# Altium PCB XCKU5P.PcbDoc (part 4 of 4)
Units mil, origin at the board's own origin, x right, y up, seen from the top; angles counter-clockwise.
Board outline 2716.54 x 2559.06 mil, 5 copper layers (Top Layer, SIG1, SIG2, SIG3, Bottom Layer); 206 components, 306 nets, 1544 pads, 186 vias.
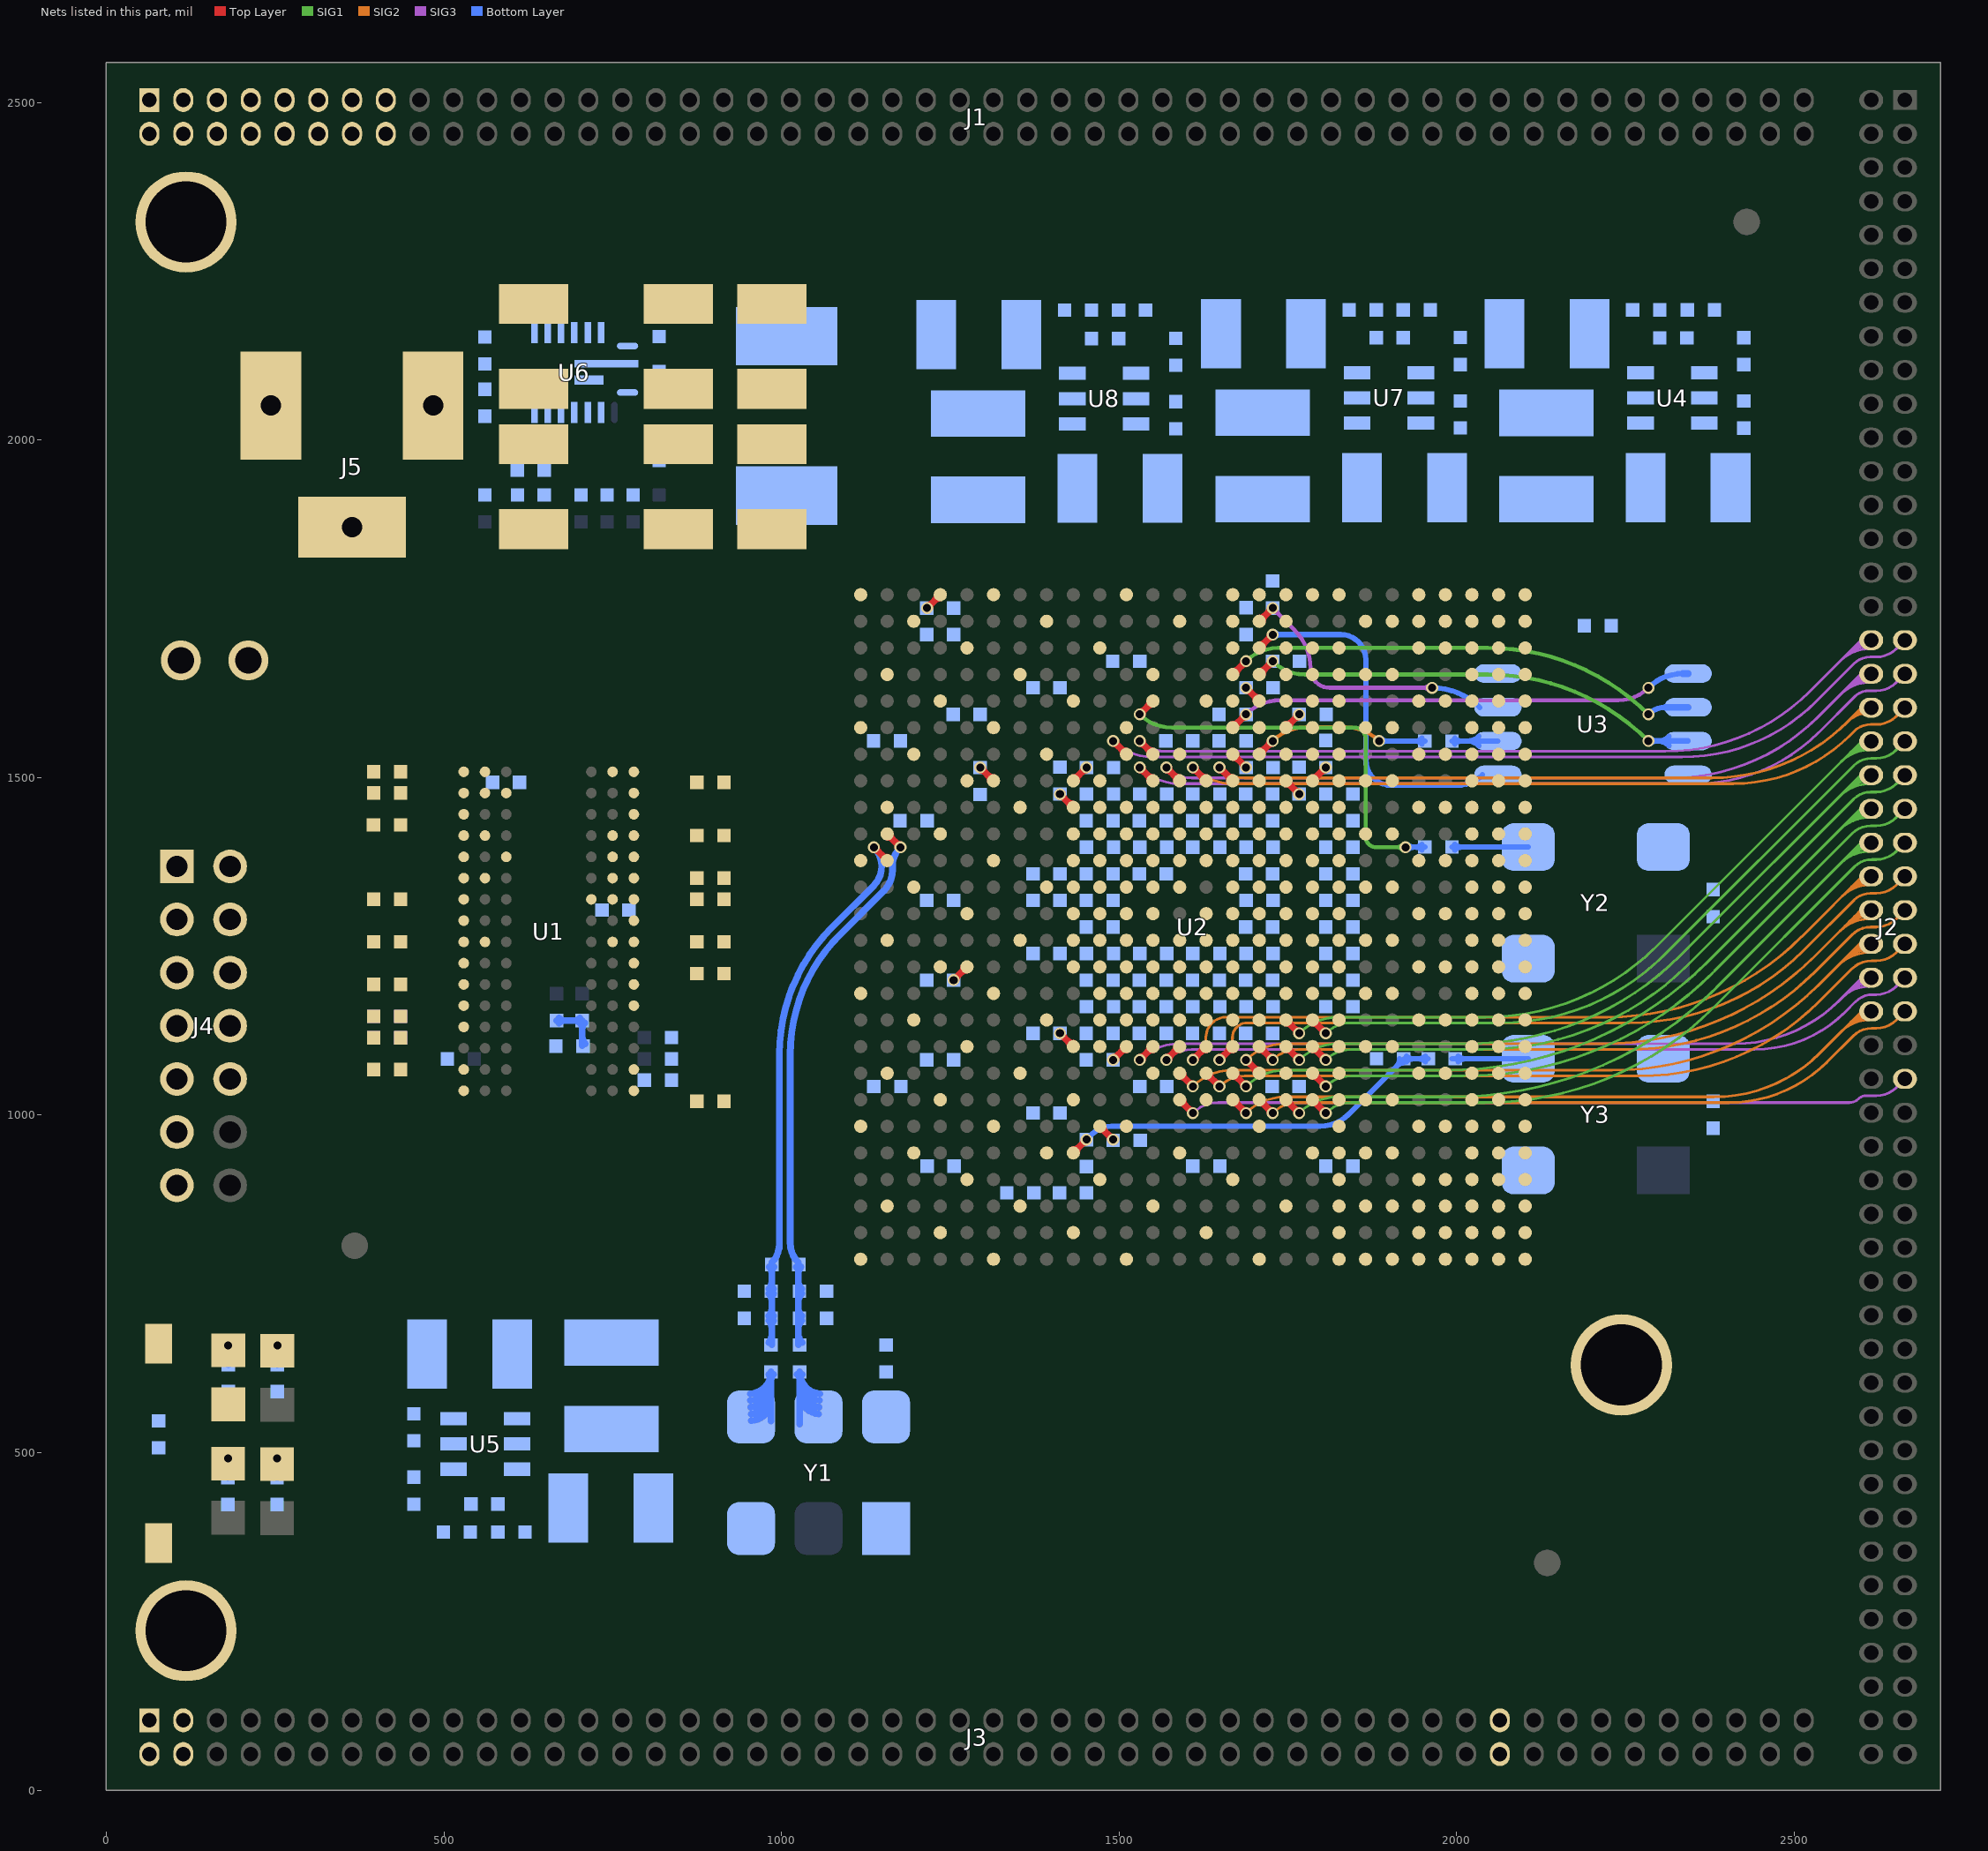
[diagram p7: the nets of this part, all layers, seen from the top]

## Via types
v1: diameter 17.72, hole 11.81, Top Layer to Bottom Layer, tented both sides, 186 vias

## Nets (pads, with @x,y where several pads share a name; then routed paths per layer and width w, separated by ;. In a path a pad name is that pad's centre, name@x,y a point inside that pad or via, vN(x,y) a via of type N, cw(c..) or ccw(c..) an arc to the next point about the centre after c; other vN are vias at no path point) (continued)
G9: J2.45 U2.G9 | length 1058.3
  Top Layer w10: U2.G9@1786.52,1017.89 cw(c1786.52,1006.19) 1794.79,1014.46 cw(c1803.05,1022.73) U2.G9@1791.36,1022.73 ; U2.G9@1786.52,1022.73 v1(1806.21,1003.04) ; v1@1802.35,1003.04 ccw(c1793.03,1003.04) 1799.62,1009.63 ccw(c1806.21,1016.21) v1@1806.21,1006.9
  SIG1 w4: v1(1806.21,1003.04) cw(c1843.47,965.78) 1843.47,1018.48 2041.62,1018.48 ccw(c2041.62,1496.87) 2379.9,1158.6 2589.16,1367.86 cw(c2614.84,1342.19) 2614.84,1378.5 2621.4,1378.5 ccw(c2621.4,1421.04) 2651.48,1390.96 J2.45@2664.02,1403.5
G10: J2.46 U2.G10 | length 1183
  Top Layer w10: U2.G10@1747.15,1017.89 cw(c1747.15,1006.19) 1755.42,1014.46 cw(c1763.68,1022.73) U2.G10@1751.99,1022.73 ; U2.G10@1747.15,1022.73 v1(1766.84,1003.04) ; v1@1762.98,1003.04 ccw(c1753.66,1003.04) 1760.25,1009.63 ccw(c1766.84,1016.21) v1@1766.84,1006.9
  SIG1 w4: v1(1766.84,1003.04) cw(c1824.62,945.26) 1824.62,1026.98 1994.11,1026.98 ccw(c1994.11,1579.51) 2384.37,1188.37 ; 2384.81,1188.81 J2.46@2608.35,1412.35 ; 2569.53,1373.53 cw(c2611.07,1332) J2.46@2611.07,1390.74 ; 2576.36,1380.36 cw(c2611.07,1345.65) J2.46@2611.07,1394.74 ; 2583.19,1387.19 cw(c2611.07,1359.31) J2.46@2611.07,1398.74 ; 2590.02,1394.02 cw(c2611.07,1372.97) J2.46@2611.07,1402.74
G11: J2.55 U2.G11 | length 1045.1
  Top Layer w10: U2.G11@1707.78,1017.89 cw(c1707.78,1006.19) 1716.05,1014.46 cw(c1724.31,1022.73) U2.G11@1712.62,1022.73 ; U2.G11@1707.78,1022.73 v1(1727.47,1003.04) ; v1@1723.61,1003.04 ccw(c1714.29,1003.04) 1720.88,1009.63 ccw(c1727.47,1016.21) v1@1727.47,1006.9
  SIG2 w4: v1(1727.47,1003.04) cw(c1764.73,965.78) 1764.73,1018.48 2403.15,1018.48 ccw(c2403.15,1224.47) 2548.81,1078.81 2587.31,1117.31 cw(c2614.33,1090.28) 2614.33,1128.5 2621.4,1128.5 ccw(c2621.4,1171.04) 2651.48,1140.96 J2.55@2664.02,1153.5
G12: J2.56 U2.G12 | length 1170.1
  Top Layer w10: U2.G12@1668.41,1017.89 cw(c1668.41,1006.19) 1676.68,1014.46 cw(c1684.94,1022.73) U2.G12@1673.25,1022.73 ; U2.G12@1668.41,1022.73 v1(1688.1,1003.04) ; v1@1684.24,1003.04 ccw(c1674.92,1003.04) 1681.51,1009.63 ccw(c1688.1,1016.21) v1@1688.1,1006.9
  SIG2 w4: v1(1688.1,1003.04) cw(c1745.88,945.26) 1745.88,1026.98 2381.89,1026.98 ccw(c2381.89,1247.13) 2537.56,1091.46 J2.56@2606.75,1160.65 ; 2569.7,1123.6 cw(c2611.07,1082.24) J2.56@2611.07,1140.74 ; 2576.53,1130.43 cw(c2611.07,1095.89) J2.56@2611.07,1144.74 ; 2583.36,1137.26 cw(c2611.07,1109.55) J2.56@2611.07,1148.74 ; 2590.19,1144.09 cw(c2611.07,1123.21) J2.56@2611.07,1152.74
G14: J2.59 U2.G14 | length 1130.8
  Top Layer w10: U2.G14@1589.67,1017.89 cw(c1589.67,1006.19) 1597.94,1014.46 cw(c1606.2,1022.73) U2.G14@1594.51,1022.73 ; U2.G14@1589.67,1022.73 v1(1609.36,1003.04) ; v1@1605.5,1003.04 ccw(c1596.18,1003.04) 1602.77,1009.63 ccw(c1609.36,1016.21) v1@1609.36,1006.9
  SIG3 w4: v1(1609.36,1003.04) cw(c1646.62,965.78) 1646.62,1018.48 2573,1018.48 2581.77,1018.48 ccw(c2581.77,1037.09) 2594.93,1023.93 cw(c2605.96,1012.89) 2605.96,1028.5 2621.4,1028.5 ccw(c2621.4,1071.04) 2651.48,1040.96 J2.59@2664.02,1053.5
GCLK1: R35.2 U2.AB15 | length 723.4
  Top Layer w10: v1(1530.62,1593.59) U2.AB15@1550.3,1613.28 ; v1@1530.62,1597.45 ccw(c1530.62,1606.76) 1537.2,1600.18 ccw(c1543.79,1593.59) v1@1534.47,1593.59 ; U2.AB15@1545.46,1613.28 cw(c1533.77,1613.28) 1542.03,1605.01 cw(c1550.3,1596.75) U2.AB15@1550.3,1608.44
  SIG1 w6: v1@1535.72,1588.48 v1(1530.62,1593.59) ccw(c1578.26,1641.23) 1578.26,1573.86 1619.5,1573.86 1848.63,1573.86 cw(c1848.63,1557.19) 1865.31,1557.19 1865.31,1411.99 ccw(c1880.56,1411.99) 1880.56,1396.74 v1(1924.31,1396.74) ; v1@1920.17,1392.6 ccw(c1910.17,1382.6) 1910.17,1396.74 ccw(c1910.17,1410.89) v1@1920.17,1400.89
  Bottom Layer w8: v1@1923.43,1397 R35.2@1953,1397 ; v1@1927.75,1393.31 cw(c1936.66,1384.4) 1936.66,1397 ; v1@1927.75,1400.18 ccw(c1935.43,1407.86) 1935.43,1397 ; R35.2@1948.76,1392.76 ccw(c1938.51,1382.51) 1938.51,1397 ccw(c1938.51,1411.49) R35.2@1948.76,1401.24
GCLK2: C121.1 R56.2 R57.1 U2.E18 | length 678.4
  Top Layer w10: U2.E18@1432.19,943.99 v1(1451.88,963.67) ; U2.E18@1432.19,948.83 ccw(c1432.19,960.52) 1440.46,952.25 ccw(c1448.72,943.99) U2.E18@1437.03,943.99 ; v1@1448.02,963.67 cw(c1438.7,963.67) 1445.29,957.09 cw(c1451.88,950.5) v1@1451.88,959.82
  Bottom Layer w8: v1(1451.88,963.67) 1459.82,971.62 cw(c1488.5,942.94) 1488.5,983.5 1797.8,983.5 ccw(c1797.8,1043.02) 1839.89,1000.93 1849.48,1010.52 R57.1@1922.31,1083.36 ; 1910.36,1071.41 ccw(c1898.41,1083.36) R57.1@1915.31,1083.36 ; R57.1@1912.78,1073.83 cw(c1921.31,1065.29) R57.1@1921.31,1077.36 ; R57.1@1924.36,1083.36 C121.1@1958,1083.36 ; R57.1@1925.56,1079.12 cw(c1935.8,1068.88) 1935.8,1083.36 cw(c1935.8,1097.85) R57.1@1925.56,1087.61 ; C121.1@1953.76,1079.12 ccw(c1943.51,1068.88) 1943.51,1083.36 ccw(c1943.51,1097.85) C121.1@1953.76,1087.61
GND: C1.2 C2.2 C3.2 C4.2 C5.2 C6.2 C7.2 C8.2 C9.2 C10.2 C11.2 C12.2 C13.2 C15.2 C16.2 C17.2 C18.1 C19.1 C20.2 C21.2 C22.2 C23.2 C24.1 C26.2 C27.2 C28.2 C29.2 C30.2 C31.2 C32.2 C33.2 C34.2 C35.2 C36.2 C37.2 C38.2 C39.2 C40.2 C41.2 C42.2 C43.2 C44.2 C45.2 C46.2 C47.2 C48.2 C49.2 C50.2 C51.2 C52.2 C53.2 C54.2 C55.2 C56.2 C57.2 C58.2 C59.2 C60.2 C61.2 C62.2 C63.2 C64.2 C65.2 C66.2 C67.2 C68.2 C69.2 C70.2 C71.2 C72.2 C73.2 C74.2 C75.2 C76.2 C77.2 C78.2 C79.2 C82.2 C83.2 C84.2 C85.2 C86.2 C87.2 C88.2 C89.2 C90.2 C94.2 C95.2 C97.2 C99.2 C100.2 C101.2 C102.2 C103.2 C104.2 C105.2 C106.2 C107.2 C108.2 C109.2 C110.2 C111.2 C112.2 C113.2 C114.2 C115.2 C116.2 C117.2 C120.2 J1.1 J1.2 J1.3 J1.4 J1.5 J1.6 J1.13 J1.14 J3.1 J3.2 J3.3 J3.4 J3.81 J3.82 J4.1 J4.2 J4.3 J4.4 J4.5 J4.6 J4.7 J5.2 J6.1 K1.2 pad.0 R3.1 R4.2 R5.2 R8.2 R11.2 R14.2 R17.2 R20.1 R25.2 R27.1 R30.2 R44.2 R45.2 R46.2 R47.2 R48.2 R49.2 R50.2 R51.2 R54.2 R55.2 R57.2 U1.A2 U1.A8 U1.B2 U1.C9 U1.D2 U1.D8 U1.E1 U1.E3 U1.E8 U1.E9 U1.F1 U1.G8 U1.H1 U1.H9 U1.K1 U1.K9 U1.M9 U1.N1 U1.T1 U2.A1 U2.A2 U2.A3 U2.A4 U2.A5 U2.A6 U2.A7 U2.A8 U2.A11 U2.A16 U2.A21 U2.A26 U2.AA1 U2.AA2 U2.AA3 U2.AA6 U2.AA7 U2.AA8 U2.AA9 U2.AA16 U2.AA26 U2.AB1 U2.AB2 U2.AB3 U2.AB4 U2.AB5 U2.AB8 U2.AB13 U2.AB23 U2.AC1 U2.AC2 U2.AC3 U2.AC6 U2.AC7 U2.AC8 U2.AC9 U2.AC10 U2.AC20 U2.AC25 U2.AD1 U2.AD2 U2.AD3 U2.AD4 U2.AD5 U2.AD8 U2.AD9 U2.AD10 U2.AD17 U2.AE1 U2.AE2 U2.AE3 U2.AE4 U2.AE5 U2.AE6 U2.AE7 U2.AE10 U2.AE14 U2.AE19 U2.AE24 U2.AF1 U2.AF2 U2.AF3 U2.AF4 U2.AF5 U2.AF8 U2.AF9 U2.AF10 U2.AF11 U2.AF12 U2.AF16 U2.AF21 U2.AF26 U2.B1 U2.B2 U2.B3 U2.B4 U2.B5 U2.B8 U2.B13 U2.B18 U2.B23 U2.C1 U2.C2 U2.C3 U2.C4 U2.C5 U2.C6 U2.C7 U2.C8 U2.C10 U2.C15 U2.C25 U2.D1 U2.D2 U2.D3 U2.D4 U2.D5 U2.D8 U2.D12 U2.D22 U2.E1 U2.E2 U2.E3 U2.E6 U2.E7 U2.E8 U2.E19 U2.F1 U2.F2 U2.F3 U2.F4 U2.F5 U2.F8 U2.F11 U2.F16 U2.F21 U2.F26 U2.G1 U2.G2 U2.G3 U2.G6 U2.G7 U2.G8 U2.G13 U2.G23 U2.H1 U2.H2 U2.H3 U2.H4 U2.H5 U2.H8 U2.H20 U2.J1 U2.J2 U2.J3 U2.J6 U2.J7 U2.J8 U2.J17 U2.K1 U2.K2 U2.K3 U2.K4 U2.K5 U2.K8 U2.K12 U2.K14 U2.K16 U2.K19 U2.K24 U2.L1 U2.L2 U2.L3 U2.L6 U2.L7 U2.L8 U2.L11 U2.L13 U2.L15 U2.L17 U2.L21 U2.L26 U2.M1 U2.M2 U2.M3 U2.M4 U2.M5 U2.M8 U2.M10 U2.M12 U2.M14 U2.M16 U2.M23 U2.N1 U2.N2 U2.N3 U2.N6 U2.N7 U2.N8 U2.N11 U2.N13 U2.N15 U2.N17 U2.N20 U2.N25 U2.P1 U2.P2 U2.P3 U2.P4 U2.P5 U2.P8 U2.P10 U2.P12 U2.P13 U2.P16 U2.R1 U2.R2 U2.R3 U2.R6 U2.R7 U2.R8 U2.R11 U2.R14 U2.R15 U2.R17 U2.R19 U2.R24 U2.T1 U2.T2 U2.T3 U2.T4 U2.T5 U2.T8 U2.T10 U2.T12 U2.T13 U2.T14 U2.T16 U2.T21 U2.T26 U2.U1 U2.U2 U2.U3 U2.U6 U2.U7 U2.U8 U2.U11 U2.U13 U2.U15 U2.U17 U2.U18 U2.V1 U2.V2 U2.V3 U2.V4 U2.V5 U2.V8 U2.V10 U2.V12 U2.V14 U2.V16 U2.V20 U2.V25 U2.W1 U2.W2 U2.W3 U2.W6 U2.W7 U2.W8 U2.W11 U2.W17 U2.W22 U2.Y1 U2.Y2 U2.Y3 U2.Y4 U2.Y5 U2.Y8 U2.Y9 U2.Y19 U3.4 U4.1 U5.1 U6.5 U6.10 U6.11 U6.12 U6.13 U6.14 U6.15 U7.1 U8.1 V4.2 Y1.3 Y2.2 Y3.2
H9: J2.43 U2.H9 | length 1057.3
  Top Layer w10: U2.H9@1786.52,1057.26 cw(c1786.52,1045.57) 1794.79,1053.83 cw(c1803.05,1062.1) U2.H9@1791.36,1062.1 ; U2.H9@1786.52,1062.1 v1(1806.21,1042.41) ; v1@1802.35,1042.41 ccw(c1793.03,1042.41) 1799.62,1049 ccw(c1806.21,1055.59) v1@1806.21,1046.27
  SIG1 w4: v1(1806.21,1042.41) cw(c1843.47,1005.15) 1843.47,1057.85 2010,1057.85 ccw(c2010,1580.4) 2379.3,1210.7 ; 2381.69,1213.09 2585.75,1417.15 cw(c2613.15,1389.75) 2613.15,1428.5 2621.4,1428.5 ccw(c2621.4,1471.04) 2651.48,1440.96 J2.43@2664.02,1453.5
H11: J2.50 U2.H11 | length 1217.1
  Top Layer w10: v1@1688.09,1077.93 cw(c1688.09,1068.61) 1694.68,1075.2 cw(c1701.27,1081.78) v1@1691.95,1081.78 ; v1(1688.09,1081.78) U2.H11@1707.78,1062.1 ; U2.H11@1702.94,1062.1 ccw(c1691.25,1062.1) 1699.51,1070.37 ccw(c1707.78,1078.63) U2.H11@1707.78,1066.94
  SIG2 w4: v1(1688.09,1081.78) cw(c1745.88,1024) 1745.88,1105.72 2216.82,1105.72 ccw(c2216.82,1549.68) 2530.75,1235.75 J2.50@2607.25,1312.25 ; 2567.82,1272.82 cw(c2611.07,1229.58) J2.50@2611.07,1290.74 ; 2574.65,1279.65 cw(c2611.07,1243.24) J2.50@2611.07,1294.74 ; 2581.48,1286.48 cw(c2611.07,1256.9) J2.50@2611.07,1298.74 ; 2588.31,1293.31 cw(c2611.07,1270.55) J2.50@2611.07,1302.74 ; 2595.14,1300.14 cw(c2611.07,1284.21) J2.50@2611.07,1306.74
H12: J2.44 U2.H12 | length 1296.2
  Top Layer w10: U2.H12@1668.41,1057.26 cw(c1668.41,1045.57) 1676.68,1053.83 cw(c1684.94,1062.1) U2.H12@1673.25,1062.1 ; U2.H12@1668.41,1062.1 v1(1688.1,1042.41) ; v1@1684.24,1042.41 ccw(c1674.92,1042.41) 1681.51,1049 ccw(c1688.1,1055.59) v1@1688.1,1046.27
  SIG1 w4: v1(1688.1,1042.41) cw(c1745.88,984.63) 1745.88,1066.35 1983.78,1066.35 ccw(c1983.78,1615.01) 2371.75,1227.05 J2.44@2608.8,1464.1 ; 2567.31,1422.61 cw(c2611.07,1378.86) J2.44@2611.07,1440.74 ; 2574.14,1429.44 cw(c2611.07,1392.51) J2.44@2611.07,1444.74 ; 2580.97,1436.27 cw(c2611.07,1406.17) J2.44@2611.07,1448.74 ; 2587.8,1443.1 cw(c2611.07,1419.83) J2.44@2611.07,1452.74 ; 2594.63,1449.93 cw(c2611.07,1433.49) J2.44@2611.07,1456.74
H13: J2.51 U2.H13 | length 1141.5
  Top Layer w10: U2.H13@1629.04,1057.26 cw(c1629.04,1045.57) 1637.31,1053.83 cw(c1645.57,1062.1) U2.H13@1633.88,1062.1 ; U2.H13@1629.04,1062.1 v1(1648.73,1042.41) ; v1@1644.87,1042.41 ccw(c1635.55,1042.41) 1642.14,1049 ccw(c1648.73,1055.59) v1@1648.73,1046.27
  SIG2 w4: v1(1648.73,1042.41) cw(c1685.99,1005.15) 1685.99,1057.85 2270.88,1057.85 ccw(c2270.88,1433.66) 2536.62,1167.92 2585.17,1216.47 cw(c2614.21,1187.44) 2614.21,1228.5 2621.4,1228.5 ccw(c2621.4,1271.04) 2651.48,1240.96 J2.51@2664.02,1253.5
H14: J2.52 U2.H14 | length 1307.4
  Top Layer w10: U2.H14@1589.67,1057.26 cw(c1589.67,1045.57) 1597.94,1053.83 cw(c1606.2,1062.1) U2.H14@1594.51,1062.1 ; U2.H14@1589.67,1062.1 v1(1609.36,1042.41) ; v1@1605.5,1042.41 ccw(c1596.18,1042.41) 1602.77,1049 ccw(c1609.36,1055.59) v1@1609.36,1046.27
  SIG2 w4: v1(1609.36,1042.41) cw(c1667.14,984.63) 1667.14,1066.35 2230.34,1066.35 ccw(c2230.34,1499) 2536.27,1193.07 ; 2536.27,1193.07 J2.52@2605.55,1262.35 ; 2564.75,1221.55 cw(c2611.07,1175.24) J2.52@2611.07,1240.74 ; 2571.58,1228.38 cw(c2611.07,1188.89) J2.52@2611.07,1244.74 ; 2578.41,1235.21 cw(c2611.07,1202.55) J2.52@2611.07,1248.74 ; 2585.24,1242.04 cw(c2611.07,1216.21) J2.52@2611.07,1252.74 ; 2592.07,1248.87 cw(c2611.07,1229.86) J2.52@2611.07,1256.74
J9: J2.41 U2.J9 | length 1069.2
  Top Layer w10: U2.J9@1786.52,1096.63 cw(c1786.52,1084.94) 1794.79,1093.2 cw(c1803.05,1101.47) U2.J9@1791.36,1101.47 ; U2.J9@1786.52,1101.47 v1(1806.21,1081.78) ; v1@1802.35,1081.78 ccw(c1793.03,1081.78) 1799.62,1088.37 ccw(c1806.21,1094.96) v1@1806.21,1085.64
  SIG1 w4: v1(1806.21,1081.78) cw(c1843.47,1044.52) 1843.47,1097.22 2038.68,1097.22 ccw(c2038.68,1528) 2343.29,1223.39 2587.89,1467.99 cw(c2613.26,1442.62) 2613.26,1478.5 2621.4,1478.5 ccw(c2621.4,1521.04) 2651.48,1490.96 J2.41@2664.02,1503.5
J10: J2.42 U2.J10 | length 1220.7
  Top Layer w10: U2.J10@1747.15,1096.63 cw(c1747.15,1084.94) 1755.42,1093.2 cw(c1763.68,1101.47) U2.J10@1751.99,1101.47 ; U2.J10@1747.15,1101.47 v1(1766.84,1081.78) ; v1@1762.98,1081.78 ccw(c1753.66,1081.78) 1760.25,1088.37 ccw(c1766.84,1094.96) v1@1766.84,1085.64
  SIG1 w4: v1(1766.84,1081.78) cw(c1824.62,1024) 1824.62,1105.72 2015.56,1105.72 ccw(c2015.56,1552.72) 2331.64,1236.64 J2.42@2606.95,1511.95 ; 2567.82,1472.82 cw(c2611.07,1429.58) J2.42@2611.07,1490.74 ; 2574.65,1479.65 cw(c2611.07,1443.24) J2.42@2611.07,1494.74 ; 2581.48,1486.48 cw(c2611.07,1456.9) J2.42@2611.07,1498.74 ; 2588.31,1493.31 cw(c2611.07,1470.55) J2.42@2611.07,1502.74 ; 2595.14,1500.14 cw(c2611.07,1484.21) J2.42@2611.07,1506.74
J11: J2.49 U2.J11 | length 1066.6
  Top Layer w10: U2.J11@1707.78,1096.63 cw(c1707.78,1084.94) 1716.05,1093.2 cw(c1724.31,1101.47) U2.J11@1712.62,1101.47 ; U2.J11@1707.78,1101.47 v1(1727.47,1081.78) ; v1@1723.61,1081.78 ccw(c1714.29,1081.78) 1720.88,1088.37 ccw(c1727.47,1094.96) v1@1727.47,1085.64
  SIG2 w4: v1(1727.47,1081.78) cw(c1764.73,1044.52) 1764.73,1097.22 2253.22,1097.22 ccw(c2253.22,1489.29) 2530.45,1212.05 2585.29,1266.89 cw(c2613.32,1238.86) 2613.32,1278.5 2621.4,1278.5 ccw(c2621.4,1321.04) 2651.48,1290.96 J2.49@2664.02,1303.5
J12: J2.47 U2.J12 | length 1179.7
  Top Layer w10: v1(1648.72,1081.78) U2.J12@1668.41,1101.47 ; v1@1648.72,1085.64 ccw(c1648.72,1094.96) 1655.31,1088.37 ccw(c1661.9,1081.78) v1@1652.58,1081.78 ; U2.J12@1663.57,1101.47 cw(c1651.88,1101.47) 1660.14,1093.2 cw(c1668.41,1084.94) U2.J12@1668.41,1096.63
  SIG2 w4: v1(1648.72,1081.78) 1658.28,1091.34 ccw(c1634.81,1114.81) 1668,1114.81 cw(c1689.79,1114.81) 1689.79,1136.59 2254.91,1136.59 ccw(c2254.91,1502.79) 2513.85,1243.85 2588.47,1318.47 cw(c2612.68,1294.27) 2612.68,1328.5 2621.4,1328.5 ccw(c2621.4,1371.04) 2651.48,1340.96 J2.47@2664.02,1353.5
J13: J2.48 U2.J13 | length 1301.2
  Top Layer w10: v1(1609.35,1081.78) U2.J13@1629.04,1101.47 ; v1@1609.35,1085.64 ccw(c1609.35,1094.96) 1615.94,1088.37 ccw(c1622.53,1081.78) v1@1613.21,1081.78 ; U2.J13@1624.2,1101.47 cw(c1612.51,1101.47) 1620.77,1093.2 cw(c1629.04,1084.94) U2.J13@1629.04,1096.63
  SIG2 w4: v1(1609.35,1081.78) 1618.91,1091.34 ccw(c1595.44,1114.81) 1628.63,1114.81 cw(c1658.91,1114.81) 1658.91,1145.09 2223.84,1145.09 ccw(c2223.84,1550.79) 2510.72,1263.92 J2.48@2607.4,1360.6 ; 2570.9,1324.1 cw(c2611.07,1283.93) J2.48@2611.07,1340.74 ; 2577.73,1330.93 cw(c2611.07,1297.58) J2.48@2611.07,1344.74 ; 2584.55,1337.75 cw(c2611.07,1311.24) J2.48@2611.07,1348.74 ; 2591.38,1344.58 cw(c2611.07,1324.9) J2.48@2611.07,1352.74
J14: J2.53 U2.J14 | length 1191.5
  Top Layer w10: v1(1569.98,1081.78) U2.J14@1589.67,1101.47 ; v1@1569.98,1085.64 ccw(c1569.98,1094.96) 1576.57,1088.37 ccw(c1583.16,1081.78) v1@1573.84,1081.78 ; U2.J14@1584.83,1101.47 cw(c1573.14,1101.47) 1581.4,1093.2 cw(c1589.67,1084.94) U2.J14@1589.67,1096.63
  SIG3 w4: v1(1569.98,1081.78) cw(c1607.25,1044.52) 1607.25,1097.22 2441.41,1097.22 ccw(c2441.41,1286.76) 2575.43,1152.73 2590.41,1167.71 cw(c2616.46,1141.67) 2616.46,1178.5 2621.4,1178.5 ccw(c2621.4,1221.04) 2651.48,1190.96 J2.53@2664.02,1203.5
J15: J2.54 U2.J15 | length 1314
  Top Layer w10: v1(1530.61,1081.78) U2.J15@1550.3,1101.47 ; v1@1530.61,1085.64 ccw(c1530.61,1094.96) 1537.2,1088.37 ccw(c1543.79,1081.78) v1@1534.47,1081.78 ; U2.J15@1545.46,1101.47 cw(c1533.77,1101.47) 1542.03,1093.2 cw(c1550.3,1084.94) U2.J15@1550.3,1096.63
  SIG3 w4: v1(1530.61,1081.78) cw(c1588.4,1024) 1588.4,1105.72 2412.44,1105.72 ccw(c2412.44,1323.67) 2566.55,1169.55 J2.54@2607.7,1210.7 ; 2571.24,1174.24 cw(c2611.07,1134.41) J2.54@2611.07,1190.74 ; 2578.07,1181.07 cw(c2611.07,1148.07) J2.54@2611.07,1194.74 ; 2584.9,1187.9 cw(c2611.07,1161.72) J2.54@2611.07,1198.74 ; 2591.72,1194.72 cw(c2611.07,1175.38) J2.54@2611.07,1202.74 ; 2596.75,1199.75 ccw(c2593,1203.5) J2.54@2598.3,1203.5
K9: J2.39 U2.K9 | length 1077.3
  Top Layer w10: U2.K9@1786.52,1136 cw(c1786.52,1124.31) 1794.79,1132.57 cw(c1803.05,1140.84) U2.K9@1791.36,1140.84 ; U2.K9@1786.52,1140.84 v1(1806.21,1121.15) ; v1@1802.35,1121.15 ccw(c1793.03,1121.15) 1799.62,1127.74 ccw(c1806.21,1134.33) v1@1806.21,1125.01
  SIG1 w4: v1(1806.21,1121.15) cw(c1843.47,1083.89) 1843.47,1136.59 2064.68,1136.59 ccw(c2064.68,1480.41) 2307.79,1237.29 2588.5,1518 cw(c2613.85,1492.65) 2613.85,1528.5 2621.4,1528.5 ccw(c2621.4,1571.04) 2651.48,1540.96 J2.39@2664.02,1553.5
K10: J2.40 U2.K10 | length 1202.7
  Top Layer w10: U2.K10@1747.15,1136 cw(c1747.15,1124.31) 1755.42,1132.57 cw(c1763.68,1140.84) U2.K10@1751.99,1140.84 ; U2.K10@1747.15,1140.84 v1(1766.84,1121.15) ; v1@1762.98,1121.15 ccw(c1753.66,1121.15) 1760.25,1127.74 ccw(c1766.84,1134.33) v1@1766.84,1125.01
  SIG1 w4: v1(1766.84,1121.15) cw(c1824.62,1063.37) 1824.62,1145.09 2042.58,1145.09 ccw(c2042.58,1503.87) 2296.27,1250.17 J2.40@2607.2,1561.1 ; 2569.7,1523.6 cw(c2611.07,1482.24) J2.40@2611.07,1540.74 ; 2576.53,1530.43 cw(c2611.07,1495.89) J2.40@2611.07,1544.74 ; 2583.36,1537.26 cw(c2611.07,1509.55) J2.40@2611.07,1548.74 ; 2590.19,1544.09 cw(c2611.07,1523.21) J2.40@2611.07,1552.74
NetC14_2: C14.2 C17.1 R1.1 R3.2 U1.M1
NetC25_2: C25.2 R26.1 R28.1 | length 144
  Bottom Layer w10: R26.1@667,1140 R28.1@705,1140 C25.2@705,1103 ; R26.1@670.54,1136.46 cw(c679.07,1127.93) 679.07,1140 cw(c679.07,1152.07) R26.1@670.54,1143.54 ; R28.1@701.46,1143.54 cw(c692.93,1152.07) 692.93,1140 cw(c692.93,1127.93) 701.46,1136.46 cw(c692.93,1127.93) 705,1127.93 cw(c717.07,1127.93) R28.1@708.54,1136.46 ; 705,1116.49 ccw(c720.49,1116.49) C25.2@709.54,1105.54
NetC26_1: C26.1 R6.1 U5.5
NetC27_1: C27.1 U6.16
NetC80_2: C80.2 U6.4
NetC81_1: C81.1 U4.6
NetC81_2: C81.2 L1.1 U4.2
NetC89_1: C89.1 R9.1 U4.5
NetC91_1: C91.1 R24.2 R25.1 U6.6
NetC91_2: C91.2 R23.2 R24.1
NetC92_1: C92.1 U7.6
NetC92_2: C92.2 L3.1 U7.2
NetC93_1: C93.1 U8.6
NetC93_2: C93.2 L4.1 U8.2
NetC96_1: C96.1 U6.19
NetC96_2: C96.2 L5.1 U6.17
NetC98_1: C98.1 U5.6
NetC98_2: C98.2 L2.1 U5.2
NetC101_1: C101.1 R12.1 U7.5
NetC102_1: C102.1 R15.1 U8.5
NetC118_1: C118.1 Y1.5 | length 283.5
  Bottom Layer w10: C118.1@1023.43,615.96 cw(c1014.9,607.43) 1026.97,607.43 cw(c1039.04,607.43) C118.1@1030.51,615.96 ; Y1.5@1026.97,542.5 C118.1@1026.97,619.5 ccw(c1059.28,619.5) Y1.5@1057.08,587.26 ; Y1.5@1026.97,587.38 ccw(c1057.08,587.38) Y1.5@1055.03,557.33 ; 1026.97,598.08 ccw(c1057.82,598.08) Y1.5@1055.71,567.31 ; 1026.97,608.79 ccw(c1058.55,608.79) Y1.5@1056.39,577.29
NetC119_1: C119.1 Y1.4 | length 331.6
  Bottom Layer w10: Y1.4@953.73,587.31 ccw(c952.38,619.5) C119.1@984.6,619.5 Y1.4@984.6,546.5 ; Y1.4@954.15,577.32 ccw(c952.82,609.07) 984.6,609.07 ; Y1.4@954.56,567.33 ccw(c953.25,598.64) 984.6,598.64 ; Y1.4@954.98,557.33 ccw(c953.69,588.22) 984.6,588.22 ; Y1.4@955.4,547.34 ccw(c954.13,577.79) Y1.4@984.6,577.79 ; C119.1@981.06,615.96 cw(c972.53,607.43) 984.6,607.43 cw(c996.67,607.43) C119.1@988.14,615.96
NetC121_2: C121.2 Y3.3 | length 135.8
  Bottom Layer w8: C121.2@1993,1083.36 Y3.3@2106,1083.36 ; C121.2@2002.24,1079.12 cw(c2012.49,1068.88) 2012.49,1083.36 cw(c2012.49,1097.85) C121.2@2002.24,1087.61
NetR2_1: R2.1 U2.W9 | length 60.8
  Top Layer w10: U2.W9@1786.52,1495.17 v1(1806.21,1514.86) ; U2.W9@1786.52,1500.01 ccw(c1786.52,1511.7) 1794.79,1503.44 ccw(c1803.05,1495.17) U2.W9@1791.36,1495.17 ; v1@1802.35,1514.86 cw(c1793.03,1514.86) 1799.62,1508.27 cw(c1806.21,1501.68) v1@1806.21,1511
NetR4_1: R4.1 U2.Y12 | length 60.8
  Top Layer w10: U2.Y12@1668.41,1529.7 cw(c1668.41,1518.01) 1676.68,1526.27 cw(c1684.94,1534.54) U2.Y12@1673.25,1534.54 ; U2.Y12@1668.41,1534.54 v1(1688.1,1514.85) ; v1@1684.24,1514.85 ccw(c1674.92,1514.85) 1681.51,1521.44 ccw(c1688.1,1528.03) v1@1688.1,1518.71
NetR7_1: R7.1 R8.1 U5.4
NetR10_1: R10.1 R11.1 U4.4
NetR13_1: R13.1 R14.1 U7.4
NetR16_1: R16.1 R17.1 U8.4
NetR18_2: R18.2 R19.2 U6.7
NetR21_1: R21.1 U6.2
NetR22_1: R22.1 U6.3
NetR27_2: R27.2 U1.F9
NetR34_1: R34.1 U3.6 | length 128
  Bottom Layer w8: R34.1@1993,1554 U3.6@2061.21,1554 ; R34.1@1997.24,1549.76 cw(c2007.49,1539.51) 2007.49,1554 cw(c2007.49,1568.49) R34.1@1997.24,1558.24 ; U3.6@2033.07,1547.08 ccw(c2016.38,1530.39) 2016.38,1554 ccw(c2016.38,1577.61) U3.6@2033.07,1560.92
NetR35_1: R35.1 Y2.3 | length 135.8
  Bottom Layer w8: R35.1@1993,1397 Y2.3@2106,1397 ; R35.1@1997.24,1392.76 cw(c2007.49,1382.51) 2007.49,1397 cw(c2007.49,1411.49) R35.1@1997.24,1401.24
NetR36_1: R36.1 U2.AA10 | length 60.8
  Top Layer w10: U2.AA10@1747.15,1573.91 v1(1766.84,1593.6) ; U2.AA10@1747.15,1578.75 ccw(c1747.15,1590.44) 1755.42,1582.18 ccw(c1763.68,1573.91) U2.AA10@1751.99,1573.91 ; v1@1762.98,1593.6 cw(c1753.66,1593.6) 1760.25,1587.01 cw(c1766.84,1580.42) v1@1766.84,1589.74
NetR37_1: R37.1 U2.AB11 | length 60.8
  Top Layer w10: v1@1688.09,1629.11 cw(c1688.09,1619.79) 1694.68,1626.38 cw(c1701.27,1632.97) v1@1691.95,1632.97 ; v1(1688.09,1632.97) U2.AB11@1707.78,1613.28 ; U2.AB11@1702.94,1613.28 ccw(c1691.25,1613.28) 1699.51,1621.55 ccw(c1707.78,1629.81) U2.AB11@1707.78,1618.12
NetR38_1: R38.1 V1.1 | length 61.8
  Bottom Layer w10: R38.1@176.69,466.55 ccw(c168.15,475.09) 180.23,475.09 ccw(c192.3,475.09) R38.1@183.76,466.55 ; v1@177.5,488.5 cw(c170.91,481.91) 180.23,481.91 cw(c189.54,481.91) v1@182.95,488.5 ; R38.1@180.23,463.02 v1(180.23,491.23)
NetR39_1: R39.1 V2.1 | length 61.8
  Bottom Layer w10: R39.1@249.81,634.05 ccw(c241.27,642.59) 253.35,642.59 ccw(c265.42,642.59) R39.1@256.88,634.05 ; v1@250.62,656 cw(c244.03,649.41) 253.35,649.41 cw(c262.66,649.41) v1@256.07,656 ; R39.1@253.35,630.52 v1(253.35,658.73)
NetR40_1: R40.1 V3.1 | length 61.8
  Bottom Layer w10: R40.1@249.4,466.55 ccw(c240.86,475.09) 252.94,475.09 ccw(c265.01,475.09) R40.1@256.47,466.55 ; v1@250.21,488.5 cw(c243.62,481.91) 252.94,481.91 cw(c262.25,481.91) v1@255.66,488.5 ; R40.1@252.94,463.02 v1(252.94,491.23)
NetR42_1: R42.1 U2.W10 | length 60.8
  Top Layer w10: U2.W10@1747.15,1490.33 cw(c1747.15,1478.64) 1755.42,1486.9 cw(c1763.68,1495.17) U2.W10@1751.99,1495.17 ; U2.W10@1747.15,1495.17 v1(1766.84,1475.48) ; v1@1762.98,1475.48 ccw(c1753.66,1475.48) 1760.25,1482.07 ccw(c1766.84,1488.66) v1@1766.84,1479.34
NetR43_1: R43.1 V4.1 | length 61.8
  Bottom Layer w10: R43.1@177.1,634.05 ccw(c168.56,642.59) 180.64,642.59 ccw(c192.71,642.59) R43.1@184.17,634.05 ; v1@177.91,656 cw(c171.32,649.41) 180.64,649.41 cw(c189.95,649.41) v1@183.36,656 ; R43.1@180.64,630.52 v1(180.64,658.73)
NetR44_1: R44.1 U2.W18 | length 60.8
  Top Layer w10: U2.W18@1432.19,1495.17 v1(1451.88,1514.86) ; U2.W18@1432.19,1500.01 ccw(c1432.19,1511.7) 1440.46,1503.44 ccw(c1448.72,1495.17) U2.W18@1437.03,1495.17 ; v1@1448.02,1514.86 cw(c1438.7,1514.86) 1445.29,1508.27 cw(c1451.88,1501.68) v1@1451.88,1511
NetR45_1: R45.1 U2.AF23 | length 60.8
  Top Layer w10: v1(1215.65,1751.07) U2.AF23@1235.34,1770.76 ; v1@1215.65,1754.93 ccw(c1215.65,1764.25) 1222.24,1757.66 ccw(c1228.83,1751.07) v1@1219.51,1751.07 ; U2.AF23@1230.5,1770.76 cw(c1218.81,1770.76) 1227.07,1762.49 cw(c1235.34,1754.23) U2.AF23@1235.34,1765.92
NetR46_1: R46.1 U2.V18 | length 60.8
  Top Layer w10: v1@1412.5,1471.63 cw(c1412.5,1462.31) 1419.09,1468.9 cw(c1425.68,1475.49) v1@1416.36,1475.49 ; v1(1412.5,1475.49) U2.V18@1432.19,1455.8 ; U2.V18@1427.35,1455.8 ccw(c1415.66,1455.8) 1423.92,1464.07 ccw(c1432.19,1472.33) U2.V18@1432.19,1460.64
NetR47_1: R47.1 U2.W21 | length 60.8
  Top Layer w10: v1@1294.39,1511 cw(c1294.39,1501.68) 1300.98,1508.27 cw(c1307.57,1514.86) v1@1298.25,1514.86 ; v1(1294.39,1514.86) U2.W21@1314.08,1495.17 ; U2.W21@1309.24,1495.17 ccw(c1297.55,1495.17) 1305.81,1503.44 ccw(c1314.08,1511.7) U2.W21@1314.08,1500.01
NetR48_1: R48.1 U2.J18 | length 60.8
  Top Layer w10: v1@1412.5,1117.3 cw(c1412.5,1107.98) 1419.09,1114.57 cw(c1425.68,1121.15) v1@1416.36,1121.15 ; v1(1412.5,1121.15) U2.J18@1432.19,1101.47 ; U2.J18@1427.35,1101.47 ccw(c1415.66,1101.47) 1423.92,1109.74 ccw(c1432.19,1118) U2.J18@1432.19,1106.31
NetR49_1: R49.1 U2.M22 | length 60.8
  Top Layer w10: v1(1255.02,1199.89) U2.M22@1274.71,1219.58 ; v1@1255.02,1203.75 ccw(c1255.02,1213.07) 1261.61,1206.48 ccw(c1268.2,1199.89) v1@1258.88,1199.89 ; U2.M22@1269.87,1219.58 cw(c1258.18,1219.58) 1266.44,1211.31 cw(c1274.71,1203.05) U2.M22@1274.71,1214.74
NetR50_1: R50.1 U2.J16 | length 60.8
  Top Layer w10: v1(1491.24,1081.78) U2.J16@1510.93,1101.47 ; v1@1491.24,1085.64 ccw(c1491.24,1094.96) 1497.83,1088.37 ccw(c1504.42,1081.78) v1@1495.1,1081.78 ; U2.J16@1506.09,1101.47 cw(c1494.4,1101.47) 1502.66,1093.2 cw(c1510.93,1084.94) U2.J16@1510.93,1096.63
NetR51_1: R51.1 U2.F17 | length 60.8
  Top Layer w10: U2.F17@1471.56,978.52 cw(c1471.56,966.82) 1479.83,975.09 cw(c1488.09,983.36) U2.F17@1476.4,983.36 ; U2.F17@1471.56,983.36 v1(1491.24,963.67) ; v1@1487.39,963.67 ccw(c1478.07,963.67) 1484.66,970.26 ccw(c1491.24,976.84) v1@1491.24,967.53
PROGRAM: K1.1 R41.1 U2.AB9
SPI_CLK: R34.2 U2.Y11 | length 338.2
  Top Layer w10: U2.Y11@1707.78,1534.54 v1(1727.47,1554.23) ; U2.Y11@1707.78,1539.38 ccw(c1707.78,1551.07) 1716.05,1542.81 ccw(c1724.31,1534.54) U2.Y11@1712.62,1534.54 ; v1@1723.61,1554.23 cw(c1714.29,1554.23) 1720.88,1547.64 cw(c1727.47,1541.05) v1@1727.47,1550.37
  SIG2 w6: v1(1727.47,1554.23) cw(c1776.41,1505.28) 1776.41,1574.5 1836,1574.5 cw(c1836,1505.28) v1(1884.94,1554.23)
  Bottom Layer w8: v1@1885.17,1554 R34.2@1953,1554 ; v1@1888.38,1550.79 cw(c1896.13,1543.04) 1896.13,1554 ; v1@1888.38,1557.66 ccw(c1897.22,1566.5) 1897.22,1554 ; R34.2@1948.76,1549.76 ccw(c1938.51,1539.51) 1938.51,1554 ccw(c1938.51,1568.49) R34.2@1948.76,1558.24
SPI_CS: R33.2 U2.AA12 U3.1 | length 731.7
  Top Layer w10: U2.AA12@1668.41,1573.91 v1(1688.1,1593.6) ; U2.AA12@1668.41,1578.75 ccw(c1668.41,1590.44) 1676.67,1582.17 ; U2.AA12@1673.25,1573.91 cw(c1684.95,1573.91) 1676.68,1582.18 ; v1@1684.24,1593.6 cw(c1674.92,1593.6) 1681.51,1587.01 cw(c1688.1,1580.42) v1@1688.1,1589.74
  SIG3 w6: v1(1688.1,1593.6) cw(c1738.56,1543.13) 1738.56,1614.5 2239.42,1614.5 ccw(c2239.42,1677.55) v1(2284,1632.97)
  Bottom Layer w8: v1(2284,1632.97) cw(c2334.78,1582.18) U3.1@2334.78,1654
  Bottom Layer w10: U3.1@2334.78,1654 U3.1@2342.8,1654
SPI_D0: U2.AD11 U3.5 | length 585.3
  Top Layer w10: U2.AD11@1707.78,1692.02 v1(1727.47,1711.71) ; U2.AD11@1707.78,1696.86 ccw(c1707.78,1708.55) 1716.05,1700.29 ccw(c1724.31,1692.02) U2.AD11@1712.62,1692.02 ; v1@1723.61,1711.71 cw(c1714.29,1711.71) 1720.88,1705.12 cw(c1727.47,1698.53) v1@1727.47,1707.85
  Bottom Layer w8: v1(1727.47,1711.71) 1828.35,1711.71 cw(c1828.35,1674.56) 1865.5,1674.56 1865.5,1525.65 ccw(c1902.65,1525.65) 1902.65,1488.5 1996.5,1488.5 2000.58,1488.5 ccw(c2000.58,1541.42) U3.5@2038,1504 ; v1@1730.9,1708.27 cw(c1739.19,1699.98) 1739.19,1711.71 cw(c1739.19,1723.43) v1@1730.9,1715.14
SPI_D1: U2.AC12 U3.2 | length 749.9
  Top Layer w10: U2.AC12@1668.41,1652.65 v1(1688.1,1672.34) ; U2.AC12@1668.41,1657.49 ccw(c1668.41,1669.18) 1676.68,1660.92 ccw(c1684.94,1652.65) U2.AC12@1673.25,1652.65 ; v1@1684.24,1672.34 cw(c1674.92,1672.34) 1681.51,1665.75 cw(c1688.1,1659.16) v1@1688.1,1668.48
  SIG1 w6: v1(1688.1,1672.34) cw(c1735.57,1624.86) 1735.57,1692 2046.43,1692 cw(c2046.43,1356.03) v1(2284,1593.6)
  Bottom Layer w8: v1(2284,1593.6) cw(c2309.12,1568.48) U3.2@2309.12,1604
  Bottom Layer w10: U3.2@2309.12,1604 U3.2@2342.8,1604
SPI_D2: R32.1 U2.AC11 U3.3 | length 763.3
  Top Layer w10: U2.AC11@1707.78,1652.65 v1(1727.47,1672.34) ; U2.AC11@1707.78,1657.49 ccw(c1707.78,1669.18) 1716.05,1660.92 ccw(c1724.31,1652.65) U2.AC11@1712.62,1652.65 ; v1@1723.61,1672.34 cw(c1714.29,1672.34) 1720.88,1665.75 cw(c1727.47,1659.16) v1@1727.47,1668.48
  SIG1 w6: v1(1727.47,1672.34) ccw(c1774.94,1719.81) 1774.94,1652.67 2046.33,1652.67 cw(c2046.33,1316.55) v1(2284,1554.22)
  Bottom Layer w8: v1(2284,1554.22) U3.3@2342.8,1554.22 ; v1@2287.44,1550.79 cw(c2295.73,1542.49) 2295.73,1554.22 cw(c2295.73,1565.95) v1@2287.44,1557.66 ; 2297.43,1554.22 cw(c2297.43,1529.85) U3.3@2314.66,1547.08 ; 2298.51,1554.22 ccw(c2298.51,1577.07) U3.3@2314.66,1560.92
SPI_D3: R31.1 U2.AE11 U3.7 | length 489.6
  Top Layer w10: U2.AE11@1707.78,1731.39 v1(1727.47,1751.08) ; U2.AE11@1707.78,1736.23 ccw(c1707.78,1747.92) 1716.05,1739.66 ccw(c1724.31,1731.39) U2.AE11@1712.62,1731.39 ; v1@1723.61,1751.08 cw(c1714.29,1751.08) 1720.88,1744.49 cw(c1727.47,1737.9) v1@1727.47,1747.22
  SIG3 w6: v1@1727.47,1745.22 cw(c1727.47,1731.07) 1737.47,1741.08 cw(c1747.47,1751.08) v1@1733.32,1751.08 ; v1(1727.47,1751.08) 1759.47,1719.07 cw(c1701.47,1661.06) 1783.5,1661.06 ccw(c1811.6,1661.06) 1811.6,1632.97 1912.5,1632.97 v1(1963.68,1632.97) ; v1@1959.54,1628.82 ccw(c1949.54,1618.82) 1949.54,1632.97 ccw(c1949.54,1647.11) v1@1959.54,1637.11
  Bottom Layer w8: v1(1963.68,1632.97) cw(c1963.68,1533.14) U3.7@2034.27,1603.73
SYS_CLK_N: C118.2 R52.2 R54.1 R58.1 U2.U25 | length 944.2
  Top Layer w10: U2.U25@1156.6,1411.59 cw(c1156.6,1399.9) 1164.87,1408.16 cw(c1173.13,1416.43) U2.U25@1161.44,1416.43 ; U2.U25@1156.6,1416.43 v1(1176.28,1396.74) ; v1@1172.43,1396.74 ccw(c1163.11,1396.74) 1169.7,1403.33 ccw(c1176.28,1409.92) v1@1176.28,1400.6
  Bottom Layer w10: R58.1@1022.06,774.96 cw(c1015.05,767.95) 1024.97,767.95 ; C118.2@1024.97,659.5 1024.97,781.53 cw(c1053.87,810.43) 1013,810.43 1013,1089.84 cw(c1263.27,1089.84) 1086.3,1266.8 1151.29,1331.79 ccw(c1119.4,1363.68) 1164.5,1363.68 1164.5,1368.77 cw(c1204.06,1368.77) v1@1176.09,1396.74 ; 1024.97,676.4 ccw(c1043.87,676.4) C118.2@1030.51,663.04 ; 1024.97,682.86 cw(c1042.79,682.86) R52.2@1030.19,695.46 ; 1024.97,715.14 ccw(c1042.79,715.14) R52.2@1030.19,702.54 ; 1024.97,722.86 cw(c1042.79,722.86) R54.1@1030.19,735.46 ; 1024.97,755.14 ccw(c1042.79,755.14) R54.1@1030.19,742.54 ; 1024.97,764.91 cw(c1039.19,764.91) R58.1@1029.14,774.96
SYS_CLK_P: C119.2 R53.2 R55.1 R58.2 U2.T25 | length 960.7
  Top Layer w10: v1@1136.91,1392.89 cw(c1136.91,1383.57) 1143.5,1390.16 cw(c1150.09,1396.74) v1@1140.77,1396.74 ; v1(1136.91,1396.74) U2.T25@1156.6,1377.06 ; U2.T25@1151.76,1377.06 ccw(c1140.07,1377.06) 1148.33,1385.33 ccw(c1156.6,1393.59) U2.T25@1156.6,1381.9
  Bottom Layer w10: C119.2@981.06,663.04 ccw(c970.11,673.99) 985.6,673.99 ; R53.2@981.38,695.46 cw(c971.19,685.27) 985.6,685.27 ; R53.2@981.38,702.54 ccw(c971.19,712.72) 985.6,712.72 ; R55.1@981.38,735.46 cw(c971.19,725.27) 985.6,725.27 ; R55.1@981.38,742.54 ccw(c971.19,752.72) 985.6,752.72 ; R58.2@982.06,774.96 cw(c973.53,766.43) 985.6,766.43 cw(c997.67,766.43) R58.2@989.14,774.96 ; C119.2@985.6,659.5 985.6,781.6 ccw(c958.08,809.12) 997,809.12 997,1090.17 cw(c1262.47,1090.17) 1074.75,1277.88 1136.38,1339.51 ccw(c1107.11,1368.77) 1148.5,1368.77 ccw(c1108.94,1368.77) v1(1136.91,1396.74) ; 985.6,688.58 cw(c995.33,688.58) R53.2@988.45,695.46 ; 985.6,709.42 ccw(c995.33,709.42) R53.2@988.45,702.54 ; 985.6,728.58 cw(c995.33,728.58) R55.1@988.45,735.46 ; 985.6,749.42 ccw(c995.33,749.42) R55.1@988.45,742.54
TCK: J4.10 U2.AE12
TDI: J4.12 U2.AB12
TDO: J4.11 U2.Y10
TMS: J4.9 U2.AB10
VDD0.85: C15.1 C16.1 C20.1 C21.1 C22.1 C23.1 C24.2 C29.1 C30.1 C31.1 C32.1 C33.1 C34.1 C35.1 C36.1 C37.1 C38.1 C39.1 C40.1 C41.1 C42.1 C63.1 C64.1 C65.1 C66.1 C67.1 C68.1 C69.1 C70.1 C71.1 C72.1 C73.1 C74.1 C75.1 C76.1 C77.1 C78.1 C82.1 C83.1 C85.1 C87.1 C90.1 C107.1 C108.1 C109.1 C110.1 C112.1 C113.1 C114.1 L5.2 R23.1 U2.K11 U2.K13 U2.K15 U2.K17 U2.L9 U2.L10 U2.L12 U2.L14 U2.L16 U2.M9 U2.M11 U2.M13 U2.M15 U2.M17 U2.N9 U2.N10 U2.N12 U2.N16 U2.P9 U2.P11 U2.P15 U2.P17 U2.R9 U2.R10 U2.R12 U2.R16 U2.T9 U2.T11 U2.T15 U2.T17 U2.U9 U2.U10 U2.U12 U2.U14 U2.U16 U2.V9 U2.V11 U2.V13 U2.V15 U2.V17
VDD1.2: C1.1 C2.1 C3.1 C4.1 C5.1 C6.1 C7.1 C8.1 C9.1 C10.1 C11.1 C12.1 C14.1 C25.1 C46.1 C48.1 C51.1 C53.1 C88.1 C97.1 C100.1 C104.1 C111.1 L4.2 R1.2 R16.2 R29.2 R52.1 R53.1 U1.A1 U1.A9 U1.B3 U1.B9 U1.C1 U1.D1 U1.D9 U1.F2 U1.F8 U1.G1 U1.G7 U1.G9 U1.J1 U1.J2 U1.J8 U1.J9 U1.L1 U1.L9 U1.R1 U1.T9 U2.E24 U2.H25 U2.J22 U2.P22 U2.U23 U2.Y24
VDD1.8: C43.1 C44.1 C45.1 C47.1 C49.1 C50.1 C52.1 C54.1 C60.1 C62.1 C99.1 C116.1 C117.1 J4.8 L3.2 R2.2 R13.2 R31.2 R32.2 R33.1 R36.2 R37.2 R41.2 R42.2 R56.1 U2.AA11 U2.AA21 U2.AB18 U2.AD12 U2.AD22 U2.C20 U2.D17 U2.G18 U2.M18 U2.N14 U2.N18 U2.P18 U2.R18 U2.T18 U3.8
VDD2.5: C103.1 C105.1 C106.1 L2.2 R7.2 U1.B1 U1.R9
VDD3.3: C28.1 C55.1 C56.1 C57.1 C58.1 C59.1 C61.1 C86.1 C115.1 C120.1 J1.15 J1.16 L1.2 R10.2 R38.2 R39.2 R40.2 R43.2 U2.AC15 U2.E9 U2.E14 U2.H10 U2.H15 U2.Y14 Y1.1 Y1.6 Y2.4 Y3.4
VDD12: C13.1 C18.2 C19.2 C79.1 C84.1 C94.1 C95.1 J1.7 J1.8 J1.9 J1.10 J1.11 J1.12 J5.1 J6.2 R6.2 R9.2 R12.2 R15.2 R18.1 U4.3 U5.3 U6.9 U6.18 U7.3 U8.3
W12: J2.38 U2.W12 | length 1137.3
  Top Layer w10: v1@1648.72,1511 cw(c1648.72,1501.68) 1655.31,1508.27 cw(c1661.9,1514.86) v1@1652.58,1514.86 ; v1(1648.72,1514.86) U2.W12@1668.41,1495.17 ; U2.W12@1663.57,1495.17 ccw(c1651.88,1495.17) 1660.14,1503.44 ccw(c1668.41,1511.7) U2.W12@1668.41,1500.01
  SIG2 w4: v1(1648.72,1514.86) ccw(c1685.99,1552.12) 1685.99,1499.42 2377.68,1499.42 ccw(c2377.68,1784.88) 2579.53,1583.03 J2.38@2606.8,1610.3 ; 2580.12,1583.62 cw(c2607.31,1556.44) J2.38@2610.37,1594.76 ; 2586.25,1589.75 cw(c2608.22,1567.78) J2.38@2610.69,1598.75 ; 2592.38,1595.88 cw(c2609.12,1579.13) J2.38@2611.01,1602.74
W13: J2.37 U2.W13 | length 1154.7
  Top Layer w10: v1@1609.35,1511 cw(c1609.35,1501.68) 1615.94,1508.27 cw(c1622.53,1514.86) v1@1613.21,1514.86 ; v1(1609.35,1514.86) U2.W13@1629.04,1495.17 ; U2.W13@1624.2,1495.17 ccw(c1612.51,1495.17) 1620.77,1503.44 ccw(c1629.04,1511.7) U2.W13@1629.04,1500.01
  SIG2 w4: v1(1609.35,1514.86) ccw(c1667.14,1572.64) 1667.14,1490.92 2410.18,1490.92 ccw(c2410.18,1734.37) 2582.33,1562.23 2588.23,1568.13 cw(c2613.27,1543.08) 2613.27,1578.5 2621.4,1578.5 ccw(c2621.4,1621.04) 2651.48,1590.96 J2.37@2664.02,1603.5
W14: J2.36 U2.W14 | length 1315.2
  Top Layer w10: v1@1569.98,1511 cw(c1569.98,1501.68) 1576.57,1508.27 cw(c1583.16,1514.86) v1@1573.84,1514.86 ; v1(1569.98,1514.86) U2.W14@1589.67,1495.17 ; U2.W14@1584.83,1495.17 ccw(c1573.14,1495.17) 1581.4,1503.44 ccw(c1589.67,1511.7) U2.W14@1589.67,1500.01
  SIG3 w4: v1(1569.98,1514.86) ccw(c1607.25,1552.12) 1607.25,1499.42 2318.21,1499.42 ccw(c2318.21,1805.33) 2534.52,1589.02 J2.36@2606.8,1661.3 ; 2568.68,1623.18 cw(c2611.07,1580.79) J2.36@2611.07,1640.74 ; 2575.51,1630.01 cw(c2611.07,1594.45) J2.36@2611.07,1644.74 ; 2582.34,1636.84 cw(c2611.07,1608.1) J2.36@2611.07,1648.74 ; 2589.16,1643.66 cw(c2611.07,1621.76) J2.36@2611.07,1652.74 ; 2595.99,1650.49 cw(c2611.07,1635.42) J2.36@2611.07,1656.74
W15: J2.35 U2.W15 | length 1253.8
  Top Layer w10: v1@1530.61,1511 cw(c1530.61,1501.68) 1537.2,1508.27 cw(c1543.79,1514.86) v1@1534.47,1514.86 ; v1(1530.61,1514.86) U2.W15@1550.3,1495.17 ; U2.W15@1545.46,1495.17 ccw(c1533.77,1495.17) 1542.03,1503.44 ccw(c1550.3,1511.7) U2.W15@1550.3,1500.01
  SIG3 w4: v1(1530.61,1514.86) ccw(c1588.4,1572.64) 1588.4,1490.92 2353.66,1490.92 ccw(c2353.66,1748.9) 2536.08,1566.48 2589.26,1619.66 cw(c2610.61,1598.31) 2610.61,1628.5 2621.4,1628.5 ccw(c2621.4,1671.04) 2651.48,1640.96 J2.35@2664.02,1653.5
Y15: J2.34 U2.Y15 | length 1359.3
  Top Layer w10: v1@1530.61,1550.37 cw(c1530.61,1541.05) 1537.2,1547.64 cw(c1543.79,1554.23) v1@1534.47,1554.23 ; v1(1530.61,1554.23) U2.Y15@1550.3,1534.54 ; U2.Y15@1545.46,1534.54 ccw(c1533.77,1534.54) 1542.03,1542.81 ccw(c1550.3,1551.07) U2.Y15@1550.3,1539.38
  SIG3 w4: v1(1530.61,1554.23) ccw(c1567.88,1591.49) 1567.88,1538.79 2309.24,1538.79 ccw(c2309.24,1840.67) 2522.71,1627.21 J2.34@2606.9,1711.4 ; 2568.68,1673.18 cw(c2611.07,1630.79) J2.34@2611.07,1690.74 ; 2575.51,1680.01 cw(c2611.07,1644.45) J2.34@2611.07,1694.74 ; 2582.34,1686.84 cw(c2611.07,1658.1) J2.34@2611.07,1698.74 ; 2589.16,1693.66 cw(c2611.07,1671.76) J2.34@2611.07,1702.74 ; 2595.99,1700.49 cw(c2611.07,1685.42) J2.34@2611.07,1706.74
Y16: J2.33 U2.Y16 | length 1296.4
  Top Layer w10: v1@1491.24,1550.37 cw(c1491.24,1541.05) 1497.83,1547.64 cw(c1504.42,1554.23) v1@1495.1,1554.23 ; v1(1491.24,1554.23) U2.Y16@1510.93,1534.54 ; U2.Y16@1506.09,1534.54 ccw(c1494.4,1534.54) 1502.66,1542.81 ccw(c1510.93,1551.07) U2.Y16@1510.93,1539.38
  SIG3 w4: v1(1491.24,1554.23) ccw(c1549.03,1612.01) 1549.03,1530.29 2333.91,1530.29 ccw(c2333.91,1810.79) 2532.25,1612.45 2588.44,1668.64 cw(c2612.24,1644.85) 2612.24,1678.5 2621.4,1678.5 ccw(c2621.4,1721.04) 2651.48,1690.96 J2.33@2664.02,1703.5
pads on no net: J1.17 J1.18 J1.19 J1.20 J1.21 J1.22 J1.23 J1.24 J1.79 J1.80 J1.81 J1.82 J1.83 J1.84 J1.85 J1.86 J1.87 J1.88 J1.89 J1.90 J1.91 J1.92 J1.93 J1.94 J1.95 J1.96 J1.97 J1.98 J1.99 J1.100 J2.1 J2.2 J2.3 J2.4 J2.5 J2.6 J2.7 J2.8 J2.9 J2.10 J2.11 J2.12 J2.13 J2.14 J2.15 J2.16 J2.17 J2.18 J2.85 J2.87 J2.88 J2.89 J2.90 J2.91 J2.92 J2.93 J2.94 J2.95 J2.96 J2.97 J2.98 J2.99 J2.100 J3.5 J3.6 J3.7 J3.8 J3.9 J3.10 J3.11 J3.12 J3.13 J3.14 J3.15 J3.16 J3.17 J3.18 J3.19 J3.20 J3.83 J3.84 J3.85 J3.86 J3.87 J3.88 J3.89 J3.90 J3.91 J3.92 J3.93 J3.94 J3.95 J3.96 J3.97 J3.98 J3.99 J3.100 J4.13 J4.14 U1.T7 U2.AA4 U2.AA5 U2.AA15 U2.AA19 U2.AA22 U2.AA23 U2.AB6 U2.AB7 U2.AB19 U2.AB22 U2.AC4 U2.AC5 U2.AC16 U2.AD6 U2.AD7 U2.AD23 U2.AE8 U2.AE9 U2.AE18 U2.AE23 U2.AF6 U2.AF7 U2.AF20 U2.B6 U2.B7 U2.B16 U2.B24 U2.C23 U2.D6 U2.D7 U2.D18 U2.E4 U2.E5 U2.E13 U2.E22 U2.E26 U2.F6 U2.F7 U2.F18 U2.F19 U2.F24 U2.F25 U2.G4 U2.G5 U2.G19 U2.H6 U2.H7 U2.H23 U2.H24 U2.J4 U2.J5 U2.J23 U2.J24 U2.K6 U2.K7 U2.L4 U2.L5 U2.L23 U2.M6 U2.M7 U2.M19 U2.N4 U2.N5 U2.N24 U2.N26 U2.P6 U2.P7 U2.P24 U2.R4 U2.R5 U2.R22 U2.R23 U2.T6 U2.T7 U2.T19 U2.T24 U2.U4 U2.U5 U2.U24 U2.V6 U2.V7 U2.V19 U2.W4 U2.W5 U2.W16 U2.Y6 U2.Y7 U2.Y13 U2.Y23 U6.8 Y1.2 Y2.1 Y3.1

## Keep-outs
Keep-Out Layer:
  the board outline again, w5

## Silkscreen, mask and mechanical layers (free items; w line width, h text height)
Top Overlay:
  text "5V-12V" at 305,2247.5 h61
Bottom Overlay:
  text "0.85V" at 1074.92,1812.17 h61
  text "1.2V" at 1433,1812.17 h61
  text "1.8V" at 1863.5,1812.17 h61
  text "3.3V" at 2287.92,1812.17 h61
  text "2.5V" at 684,738.5 h61